# Altium PCB First_PCB_dip.PcbDoc
Units mm, origin at the board's own origin, x right, y up, seen from the top; angles counter-clockwise.
Board outline 105 x 69 mm, 2 copper layers (Top Layer, Bottom Layer); 26 components, 11 nets, 109 pads, 9 vias.
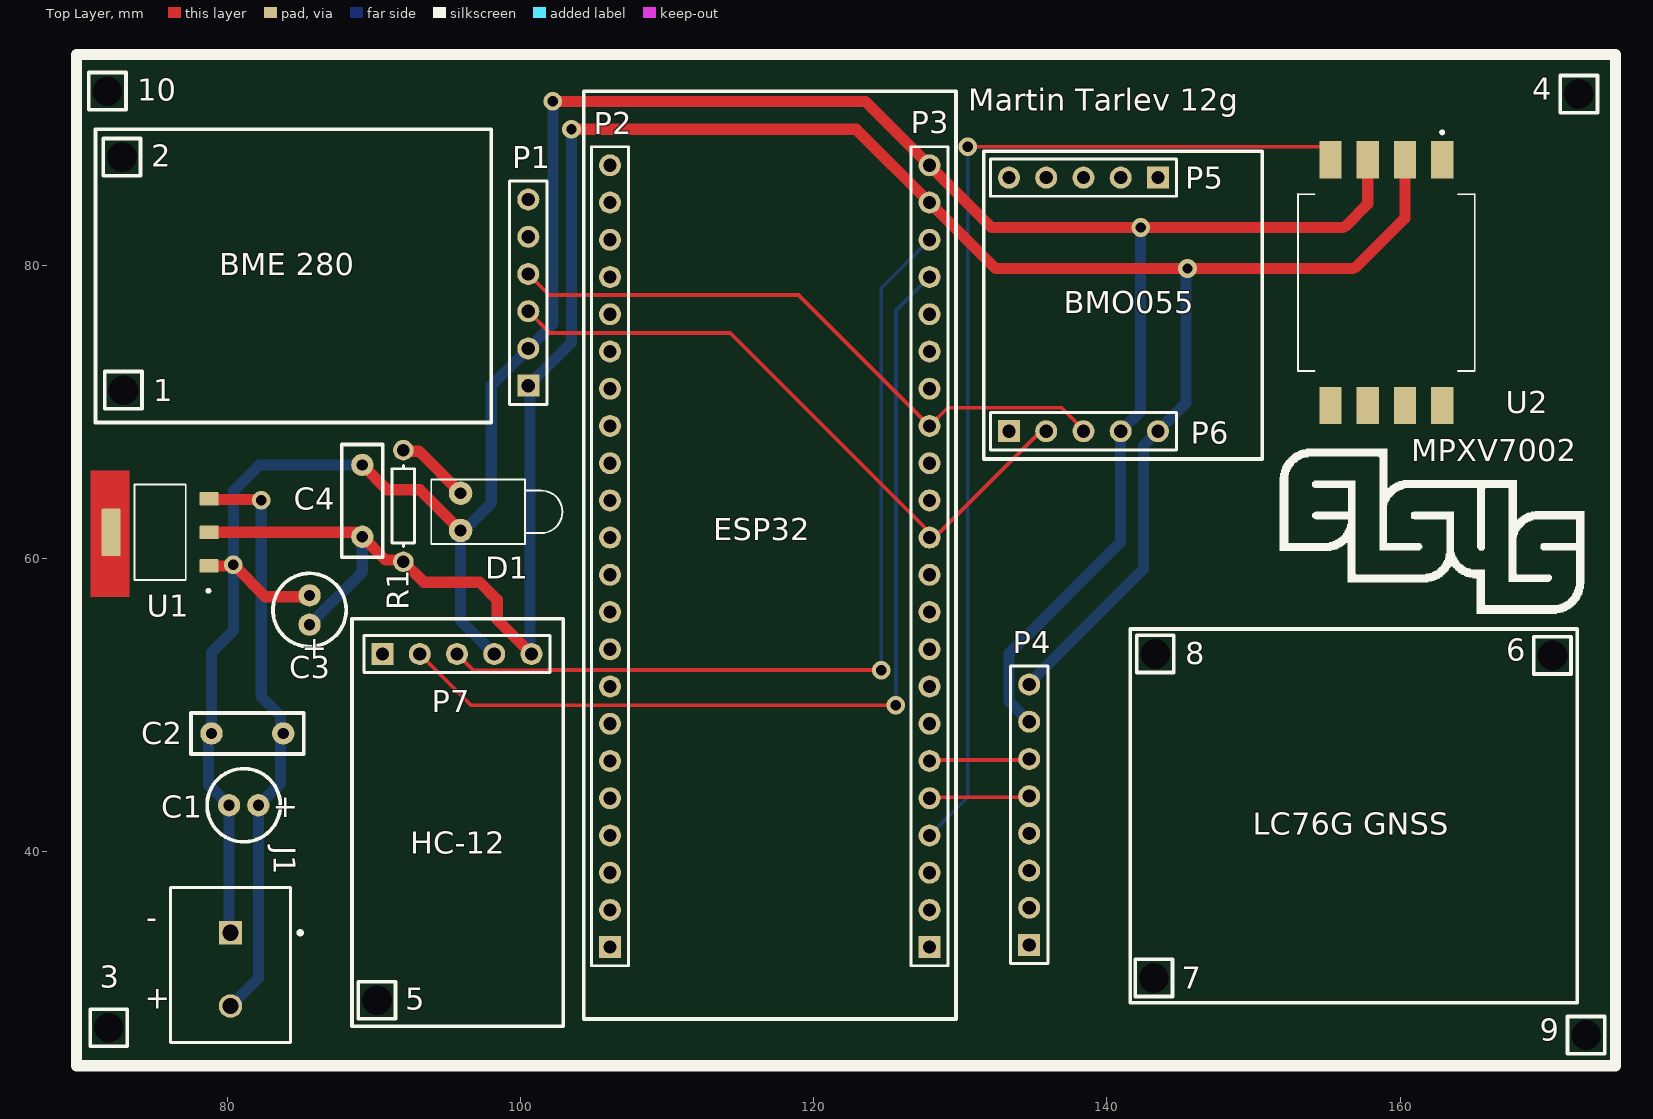
[diagram p0: Top Layer view]
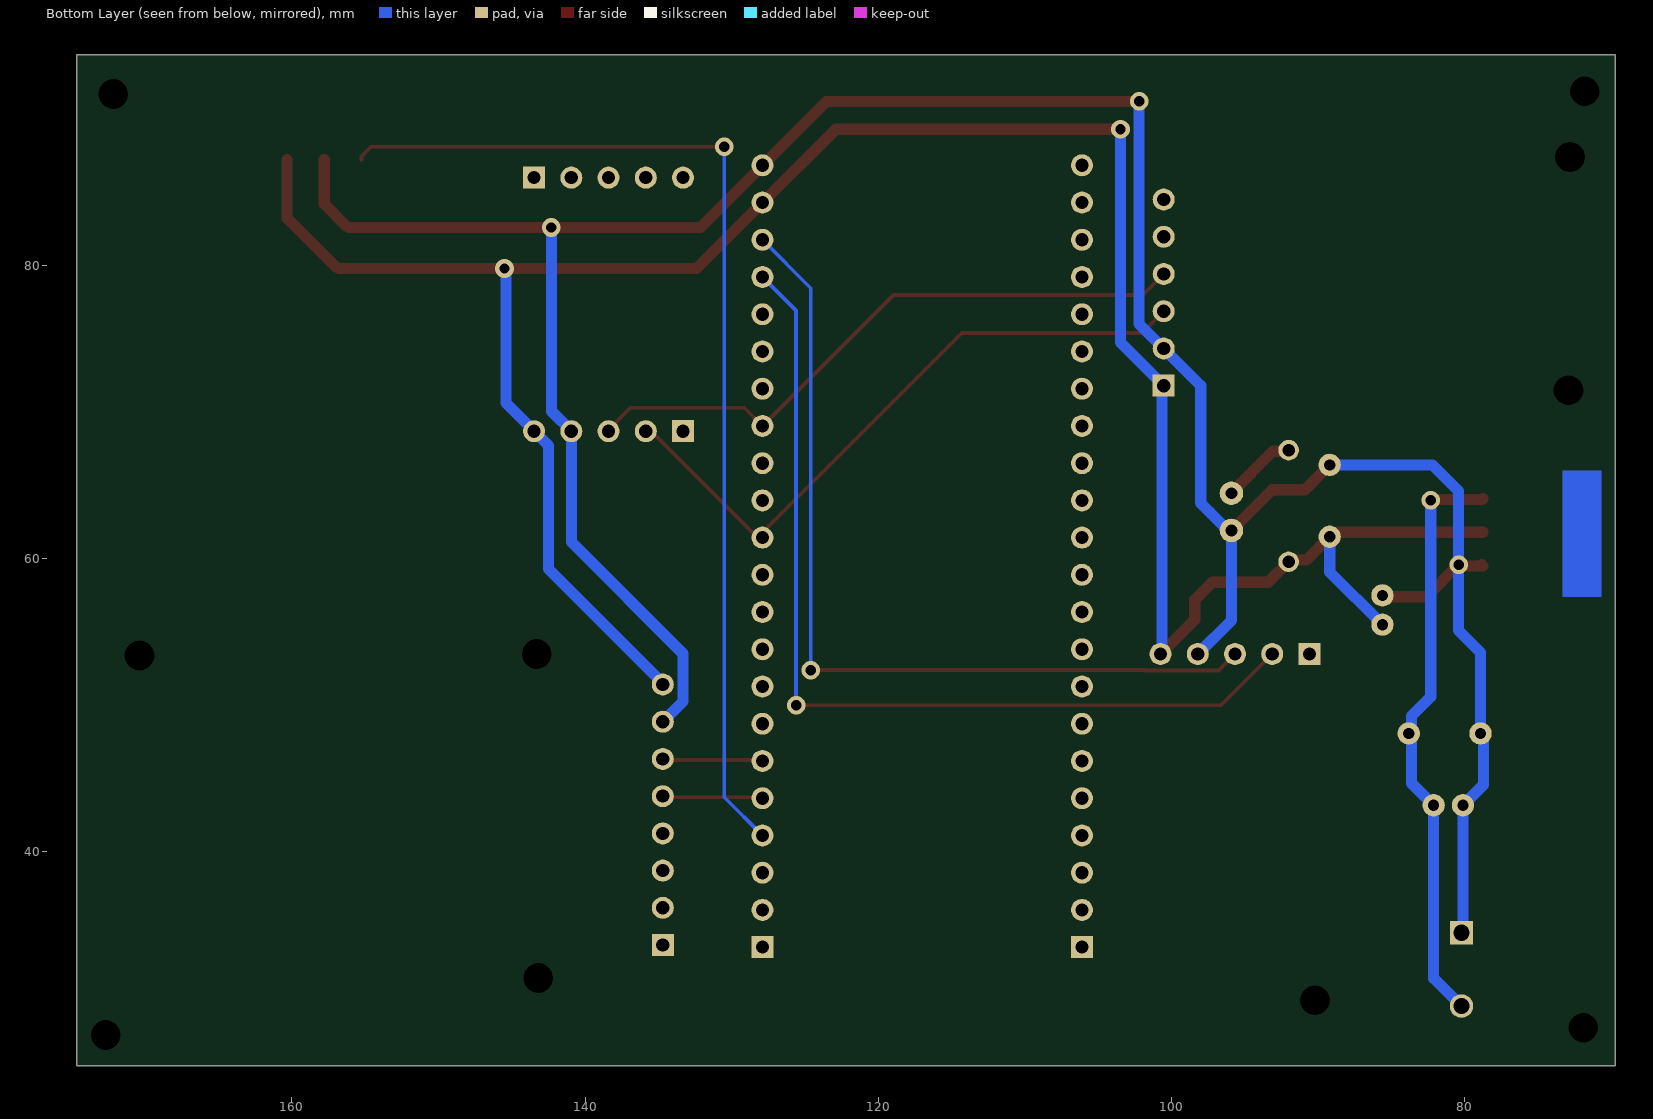
[diagram p1: Bottom Layer view, seen from below]

## Layer stack, top to bottom
Top Solder: solder mask 0.0102, Solder Resist, Dk 3.5
Top Layer: signal copper 0.0356
Dielectric 1: dielectric 0.32, FR-4, Dk 4.8
Bottom Layer: signal copper 0.0356
Bottom Solder: solder mask 0.0102, Solder Resist, Dk 3.5

## Board outline
69.7,25.4 69.7,94.4 174.7,94.4 174.7,25.4

## Design rules (kind name [scope] priority, off if disabled: settings)
Clearance [All] p1: gap=0.254 ignorepadtopadclearanceinfootprint=FALSE except(0: Arc-Hole Track-Hole SMDPad-Hole THPad-Hole Via-Hole Fill-Hole Poly-Hole Region-Hole Text-Hole)
PolygonConnect [All] p1: connectstyle=Relief reliefconductorwidth=0.254 reliefentries=4 polygonreliefangle="90 Angle" airgapwidth=0.254
RoutingVias RoutingVias_1 [All] p1: holewidth=0.711 width=1.27 viastyle="Through Hole" minholewidth=0.711 minwidth=1.27 maxholewidth=0.711 maxwidth=1.27
RoutingVias "Power VIA" [All] p2: holewidth=0.889 width=1.524 viastyle="Through Hole" minholewidth=0.889 minwidth=1.524 maxholewidth=0.889 maxwidth=1.524
SolderMaskExpansion [All] p1: expansion=0.102 istentingtop=FALSE
Width [All] p1: maxlimit=0.762 minlimit=0.254 preferedwidth=0.254
30 further rules are at their usual default settings.

## Classes and differential pairs
component class First_PCB_dip: 1 2 3 4 5 6 7 8 C1 C2 C4 D1 J1 P1 P2 P3 P4 P5 P6 P7 R1 U1 U2

## Components (designator, comment, footprint, x,y, rotation, side; value= is the part's Value field where it differs from the comment)
1 "MHNC" MHNC 72.9,71.5 r90 top
2 "MHNC" MHNC 72.8,87.4 r90 top
3 "MHNC" MHNC 71.9,28 r90 top
4 "MHNC" MHNC 172.2,91.7 r90 top
5 "MHNC" MHNC 90.2,29.875 r90 top
6 "MHNC" MHNC 170.4,53.4 r90 top
7 "MHNC" MHNC 143.2,31.4 r90 top
8 "MHNC" MHNC 143.3,53.5 r90 top
9 "MHNC" MHNC 172.7,27.5 r90 top (schematic designator 4)
10 "MHNC" MHNC 71.8,91.9 r90 top (schematic designator 4)
C1 "Cap" CON3 81.607,43.179 r0 top
C2 "Cap" CON 78.307,47.379 r90 top value=100nF
C3 "Cap" CON3 85.6,56 r270 top
C4 "Cap" CON 88.5,67 r0 top value=100nF
D1 "LED1" LED-1 95.9,63.2 r0 top
J1 "282836-2" TECO-282836-2_V 80.207,31.979 r270 top
P1 "BME280" HDR1X6 100.525,71.805 r90 top
P2 "ESP32 L" HDR1X22 106.1,33.5 r90 top
P3 "ESP32 R" HDR1X22 127.9,33.5 r90 top
P4 "GPS" HDR1X8 134.7,33.64 r90 top
P5 "BNO055 R" HDR1X5 143.48,86 r180 top
P6 "BNO055 L" HDR1X5 133.32,68.7 r0 top
P7 "HC-12" HDR1X5 90.58,53.5 r0 top
R1 "Res1" AXIAL-0.3 92,63.6 r270 top value=1K
U1 "AMS1117-5.0" SOT229P700X180-4N 75.4,61.8 r90 top
U2 "MPXV7002DP" XDCR_MPXV7002DP 159.065,78.84 r270 top (schematic designator U)

## Footprints (in the part's own frame and the unit in brackets; to place one, negate y for a bottom-side part, rotate by r counter-clockwise, add the part's x,y. Pads: shape width x height; smd on the part's side, far side on the other; paste and mask are expansions set on the pad)
AXIAL-0.3 [mm] "Axial Device, Thru-Hole; 2 Leads; 0.3 in Pin Spacing"
  round 1.4 hole 0.85: 1(-3.81,0) 2(3.81,0)
  silkscreen extent -2.77,-0.76 2.77,0.76
CON [mil]
  round 60 hole 30: 1(27.56,-23.62) 2(27.56,-216.54)
  silkscreen extent -28,-272 83,31
CON3 [mil]
  round 60 hole 30: 1(-59.06,0) 2(19.69,0)
  silkscreen extent -118,-98 79,98
HDR1X5 [mm] "Connector; Header; 5 Position"
  rect 1.5x1.5 hole 0.9: 1(0,0)
  round 1.5 hole 0.9: 2(2.54,0) 3(5.08,0) 4(7.62,0) 5(10.16,0)
  silkscreen extent -1.27,-1.27 11.43,1.27
HDR1X6 [mm] "Connector; Header; 6 Position"
  rect 1.5x1.5 hole 0.9: 1(0,0)
  round 1.5 hole 0.9: 2(2.54,0) 3(5.08,0) 4(7.62,0) 5(10.16,0) 6(12.7,0)
  silkscreen extent -1.27,-1.27 13.97,1.27
HDR1X8 [mm] "Connector; Header; 8 Position"
  rect 1.5x1.5 hole 0.9: 1(0,0)
  round 1.5 hole 0.9: 2(2.54,0) 3(5.08,0) 4(7.62,0) 5(10.16,0) 6(12.7,0) 7(15.24,0) 8(17.78,0)
  silkscreen extent -1.27,-1.27 19.05,1.27
HDR1X22 [mm] "Connector; Header; 22 Position"
  rect 1.5x1.5 hole 0.9: 1(0,0)
  round 1.5 hole 0.9: 2(2.54,0) 3(5.08,0) 4(7.62,0) 5(10.16,0) 6(12.7,0) 7(15.24,0) 8(17.78,0) 9(20.32,0) 10(22.86,0) 11(25.4,0) 12(27.94,0) 13(30.48,0) 14(33.02,0) 15(35.56,0) 16(38.1,0) 17(40.64,0) 18(43.18,0) 19(45.72,0) 20(48.26,0) 21(50.8,0) 22(53.34,0)
  silkscreen extent -1.27,-1.27 54.61,1.27
LED-1 [mm] "LED; 2 Leads"
  round 1.6 hole 0.8: 1(0,1.27) 2(0,-1.27)
  silkscreen extent -2,-2.2 6.95,2.2
MHNC [mil] "Mounting hole no copper"
  round 40 hole 80: 1(0,0)
  silkscreen extent -50,-50 50,50
SOT229P700X180-4N [mm]
  rrect15% 0.93x1.31 smd: 1(-2.29,-3.345) 2(0,-3.345) 3(2.29,-3.345)
  rrect15% 3.24x1.31 smd: 4(0,3.345)
  silkscreen extent -4.09,-3.4 3.25,1.75, body extent -3.25,-3.5 3.25,3.5, height 1.8
TECO-282836-2_V [mm] "Female Header, Pitch 5mm, 1 x 2 Position, Height 10mm"
  rect 1.6x1.6 hole 1.1: 1(-2.5,0)
  round 1.6 hole 1.1: 2(2.5,0)
  silkscreen extent -5.6,-4.1 5,4.88, body extent -5.6,-4.1 5,4.1, height 10
XDCR_MPXV7002DP [mm]
  rect 2.54x1.52 smd: 1(-8.38,3.81) 2(-8.38,1.27) 3(-8.38,-1.27) 4(-8.38,-3.81) 5(8.38,-3.81) 6(8.38,-1.27) 7(8.38,1.27) 8(8.38,3.81)
  silkscreen extent -10.35,-6.03 6.03,6.03

## Part data
C1 C3: "Capacitor", Capacitance=2.2uF, Case/Package=Radial, Max Operating Temperature=105°C, Min Operating Temperature=-55°C, Package Quantity=200, Ripple Current=18mA, Tolerance=20%, Voltage=50V, Construction=RADIAL, Diameter=5mm, Height=11mm, Height - Seated (Max)=0.492inch, Lead Diameter=0.5mm, Lead Pitch=2.5mm, Lead/Base Style=Straight, Length=11mm, Life (Hours)=1000Hour, Mount="Through Hole", Number of Pins=2, Packaging=Bulk, Polarity=Polar, REACH SVHC="No SVHC", Ripple Current (AC)=18mA, RoHS Compliant=Yes, Series=HD, Termination=Radial, Voltage Rating=50V, Voltage Rating (DC)=50V
C2 C4: "Capacitor", LatestRevisionDate=17-Jul-2002, LatestRevisionNote="Re-released for DXP Platform.", PackageDescription="Radial Cap, Thru-Hole; 2 Leads; 0.3 in Pin Spacing", PackageReference=RAD-0.3, Published=8-Jun-2000, Publisher="Altium Limited"
D1: "Typical RED GaAs LED", LatestRevisionDate=08-Jul-2005, LatestRevisionNote="Mech Layer 1 removed.", PackageDescription="LED; 2 Leads", PackageReference=LED-1, Published=8-Jun-2000, Publisher="Altium Limited"
J1: library part CMP-1684-00017-1, "Female Header, Pitch 5 mm, 1 x 2 Position, Height 10 mm, Tail Length 3.5 mm, Rohs, Bulk", Color=Green, Current=13.5A, Manufacturer="TE Connectivity", Package Description="Female Header, Pitch 5 mm, 1 x 2 Position, Height 10 mm, Tail Length 3.5 mm", Package Reference=THD, Standard Package=300, Voltage=300V, 3D Model=282836-2.pdf, Category=Connectors,Interconnects, Clamp Material - Plating=Brass-NickelPlated, Contact Material - Plating=Brass-TinPlated, Datasheet URL=http://www.te.com.cn/commerce/DocumentDelivery/DDEController?Action=showdoc&DocId=Catalog+Section%7F1308389_EUROSTYLE_TERMINAL_BLOCKS%7F0607%7Fpdf%7FEnglish%7FENG_CS_1308389_EUROSTYLE_TERMINAL_BLOCKS_0607.pdf%7F282836-2, Dynamic Catalog=BuchananSeries, Family=TerminalBlocks-WiretoBoard, Featured Product=EurostyleTerminalBlockConnectors, Features=Interlocking(Side), Housing Material=Polyamide(PA66),Nylon6/6, Manufacturer URL=http://www.te.com, Mating Orientation=HorizontalwithBoard, Mounting Type=ThroughHole, Number of Levels=1, Other Names="5ULV-02B / A98076", Packaging=Bulk, Pitch="0.197\"(5.00mm)", Positions Per Level=2, Product Training Modules=Wire-to-BoardEurostyleTerminalBlocks, RoHS Information=282836-2StatementofCompliance, Screw Material - Plating=Brass-NickelPlated, Screw Thread=M3, Series=Buchanan, Torque - Screw=0.68Nm(6Lb-In), Wire Gauge=16-30AWG, Wire Termination=Screw-RisingCageClamp
P1: library part "Header 6", "Header, 6-Pin", LatestRevisionDate=17-Jul-2002, LatestRevisionNote="Re-released for DXP Platform.", Publisher="Altium Limited"
P2 P3: library part "Header 22", "Header, 22-Pin", LatestRevisionDate=17-Jul-2002, LatestRevisionNote="Re-released for DXP Platform."
  P2: Publisher=p
  P3: Publisher="Altium Limited"
P4: library part "Header 8", "Header, 8-Pin", LatestRevisionDate=17-Jul-2002, LatestRevisionNote="Re-released for DXP Platform.", Publisher="Altium Limited"
P5 P6 P7: library part "Header 5", "Header, 5-Pin", LatestRevisionDate=17-Jul-2002, LatestRevisionNote="Re-released for DXP Platform.", Publisher="Altium Limited"
R1: "Resistor", LatestRevisionDate=17-Jul-2002, LatestRevisionNote="Re-released for DXP Platform.", PackageDescription="Axial Device, Thru-Hole; 2 Leads; 0.3 in Pin Spacing", PackageReference=AXIAL-0.3, Published=8-Jun-2000, Publisher="Altium Limited"
U1: "1A LOW DROPOUT VOLTAGE REGULATOR", Package="SOT-223 Seeed Technology", Availability="Not in stock", Check_prices=https://www.snapeda.com/parts/AMS1117-5.0/ams/view-part/?ref=eda, MF=ams, MP=AMS1117-5.0, Price=None, SnapEDA_Link=https://www.snapeda.com/parts/AMS1117-5.0/ams/view-part/?ref=snap
U2: "Pressure Sensor Â±0.29PSI (Â±2kPa) Differential Male - 0.13 (3.3mm) Tube, Dual 0.5 V ~ 4.5 V 8-BSOP (0.475, 12.06mm Width) Dual Ports, Same Side", Package="- NXP USA", Availability=Unavailable, MF="NXP USA", MP=MPXV7002DP, Price=None, SnapEDA_Link=https://www.snapeda.com/parts/MPXV7002DP/NXP%20USA%20Inc./view-part/490173/?ref=snap

## Via types
v1: diameter 1.27, hole 0.711, Top Layer to Bottom Layer, 9 vias

## Nets (pads, with @x,y where several pads share a name; then routed paths per layer and width w, separated by ;. In a path a pad name is that pad's centre, name@x,y a point inside that pad or via, vN(x,y) a via of type N, cw(c..) or ccw(c..) an arc to the next point about the centre after c; other vN are vias at no path point)
GND: C1.1 C2.1 C3.1 C4.1 D1.2 J1.1 P1.2 P3.22 P4.7 P6.4 P7.4 U1.1 U2.3 | length 199.5
  Top Layer w0.762: U1.1@78.829,59.594 U1.1 80.31,59.51 v1(80.4,59.6) 82.6,57.4 C3.1@85.541,57.4 ; C4.1@89.054,66.254 C4.1 90.9,64.7 93.13,64.7 D1.2 ; v1(102.2,91.2) 123.54,91.2 P3.22 132.14,82.6 v1(142.3,82.6) 156.1,82.6 ; 156.3,82.7 157.795,84.195 U2.3
  Bottom Layer w0.762: C1.1@80.107,43.079 80.107,34.579 J1.1 ; C1.1 78.707,44.579 78.707,48.079 78.9,48.272 78.9,53.6 80.4,55.1 v1(80.4,59.6) 80.4,64.61 82.19,66.4 C4.1 ; P7.4 95.9,55.8 D1.2 96.127,61.93 97.365,63.168 97.368,63.168 98,63.8 98,71.82 P1.2 102.2,76.02 v1(102.2,91.2) ; P4.7 133.315,50.265 133.315,53.515 140.94,61.14 P6.4 142.3,70.06 v1(142.3,82.6)
NetC1_2: C1.2 C2.2 J1.2 U1.3 | length 40.1
  Top Layer w0.762: U1.3 78.79,64.045 82.255,64.045 v1(82.3,64)
  Bottom Layer w0.762: J1.2 82.107,31.379 C1.2 83.607,44.679 83.607,48.079 83.607,49.279 82.3,50.586 v1(82.3,64)
NetD1_1: D1.1 R1.1 | length 5.1
  Top Layer w0.508: R1.1 R1.1@92.072,67.338 ; D1.1 D1.1@95.9,64.5
  Top Layer w0.762: R1.1@92.072,67.338 93.062,67.338 D1.1@95.9,64.5
NetP3_4: P3.4 U2.4 | length 73.3
  Top Layer w0.254: v1(130.5,88.1) 154.622,88.1 155.255,87.467 U2.4
  Bottom Layer w0.254: P3.4 130.5,43.72 v1(130.5,88.1)
NetP3_5: P3.5 P4.5 | length 6.9
  Top Layer w0.254: P3.5 127.97,43.73 134.63,43.73 P4.5
NetP3_6: P3.6 P4.6 | length 6.9
  Top Layer w0.254: P3.6 127.97,46.27 134.63,46.27 P4.6
NetP3_19: P3.19 P7.2 | length 64.1
  Top Layer w0.254: P7.2 96.62,50 v1(125.6,50)
  Bottom Layer w0.254: v1(125.6,50) 125.616,50.016 125.616,76.936 P3.19
NetP3_20: P3.20 P7.3 | length 60.2
  Top Layer w0.254: P7.3 96.791,52.369 101.793,52.369 101.835,52.411 124.589,52.411 v1(124.6,52.4)
  Bottom Layer w0.254: v1(124.6,52.4) 124.6,78.46 P3.20
SCK: P1.4 P3.15 P6.3 | length 43.4
  Top Layer w0.254: P1.4 101.95,78 118.96,78 P3.15 129.14,70.3 136.9,70.3 138.4,68.8 P6.3
SDA: P1.3 P3.12 P6.2 | length 45
  Top Layer w0.254: P1.3 102.01,75.4 114.3,75.4 127.534,62.166 127.534,62.143 127.9,61.777 P3.12 128.237,61.44 128.613,61.816 128.616,61.816 135.134,68.334 135.157,68.334 135.523,68.7 P6.2
VCC: C3.2 C4.2 P1.1 P3.21 P4.8 P6.5 P7.5 R1.2 U1.2 U2.2 | length 169.7
  Top Layer w0.762: U1.2 88.694,61.8 88.994,61.5 C4.2 90.788,59.912 91.878,59.912 R1.2 93.39,58.4 97.2,58.4 98.4,57.2 98.4,55.84 P7.5 ; v1(103.47,89.3) 122.9,89.3 P3.21 132.4,79.8 v1(145.5,79.8) 156.8,79.8 ; P4.8 P4.8@134.841,51.561 ; 157,79.9 160.335,83.235 U2.2
  Bottom Layer w0.762: C3.2 89.2,59.1 C4.2 ; P7.5 100.633,53.607 100.633,71.697 P1.1 103.47,74.75 v1(103.47,89.3) ; P4.8@134.75,51.55 142.5,59.3 142.5,67.72 145.4,70.62 145.4,79.7 v1(145.5,79.8)
pads on no net: 1.1 2.1 3.1 4.1 5.1 6.1 7.1 8.1 9.1 10.1 P1.5 P1.6 P2.1 P2.2 P2.3 P2.4 P2.5 P2.6 P2.7 P2.8 P2.9 P2.10 P2.11 P2.12 P2.13 P2.14 P2.15 P2.16 P2.17 P2.18 P2.19 P2.20 P2.21 P2.22 P3.1 P3.2 P3.3 P3.7 P3.8 P3.9 P3.10 P3.11 P3.13 P3.14 P3.16 P3.17 P3.18 P4.1 P4.2 P4.3 P4.4 P5.1 P5.2 P5.3 P5.4 P5.5 P6.1 P7.1 U1.4 U2.1 U2.5 U2.6 U2.7 U2.8

## Other copper
Multi-Layer:
  region: 70.687,66 73.313,66 73.313,57.4 73.113,57.4 70.687,57.4

## Silkscreen, mask and mechanical layers (free items; w line width, h text height)
Top Overlay:
  drawing of 26 lines, arcs and shapes, not listed
  text "Martin Tarlev 12g" at 130.554,90.562 h1.52
  text "BME 280" at 79.454,79.354 h1.52
  text "BMO055" at 137.054,76.754 h1.52
  text "MPXV7002" at 160.754,66.654 h1.52
  text "ESP32" at 113.154,61.254 h1.52
  text "+" at 85.074,53.158 h1.52
  text "+" at 83.074,42.358 h1.52
  text "LC76G GNSS" at 149.954,41.154 h1.52
  text "HC-12" at 92.454,39.854 h1.52
  text "-" at 74.454,34.792 h1.52
  text "+" at 74.354,29.3 h1.52